# Altium PCB PCB1.PcbDoc
Units mil, origin at the board's own origin, x right, y up, seen from the top; angles counter-clockwise.
Board outline 1397.64 x 1968.5 mil, 2 copper layers (Top Layer, Bottom Layer), stack 47.288 mil thick; 25 components, 20 nets, 121 pads, 58 vias.
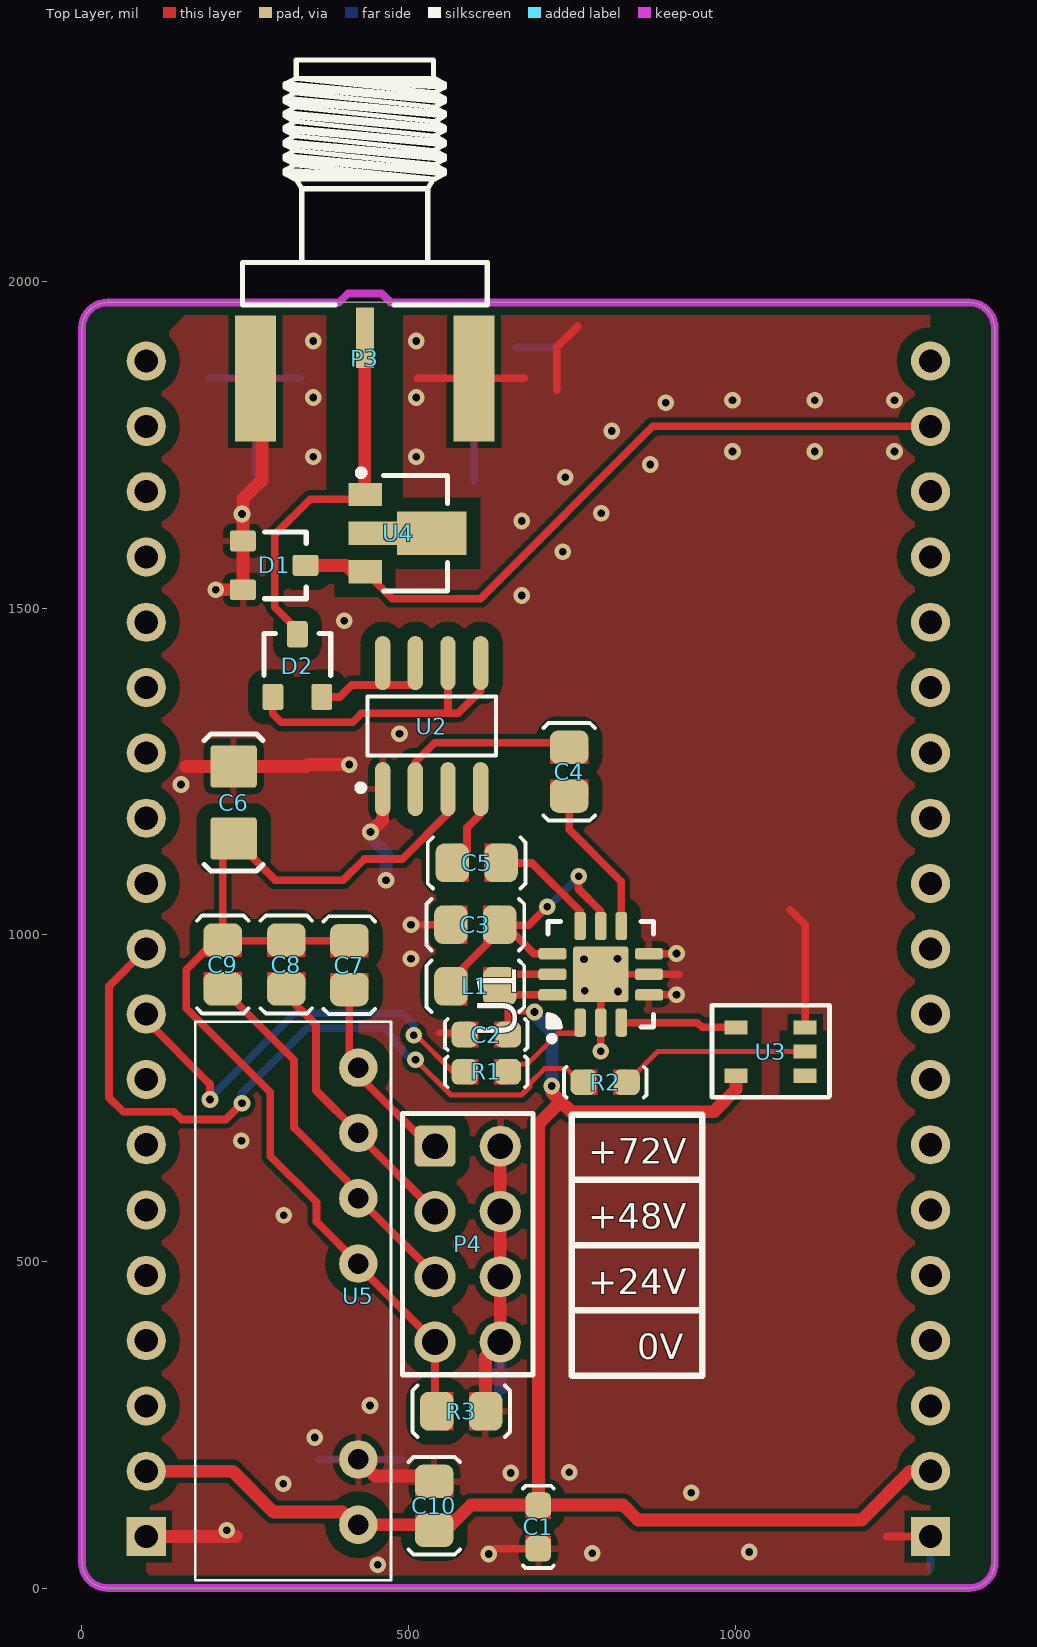
[diagram p0: Top Layer view]
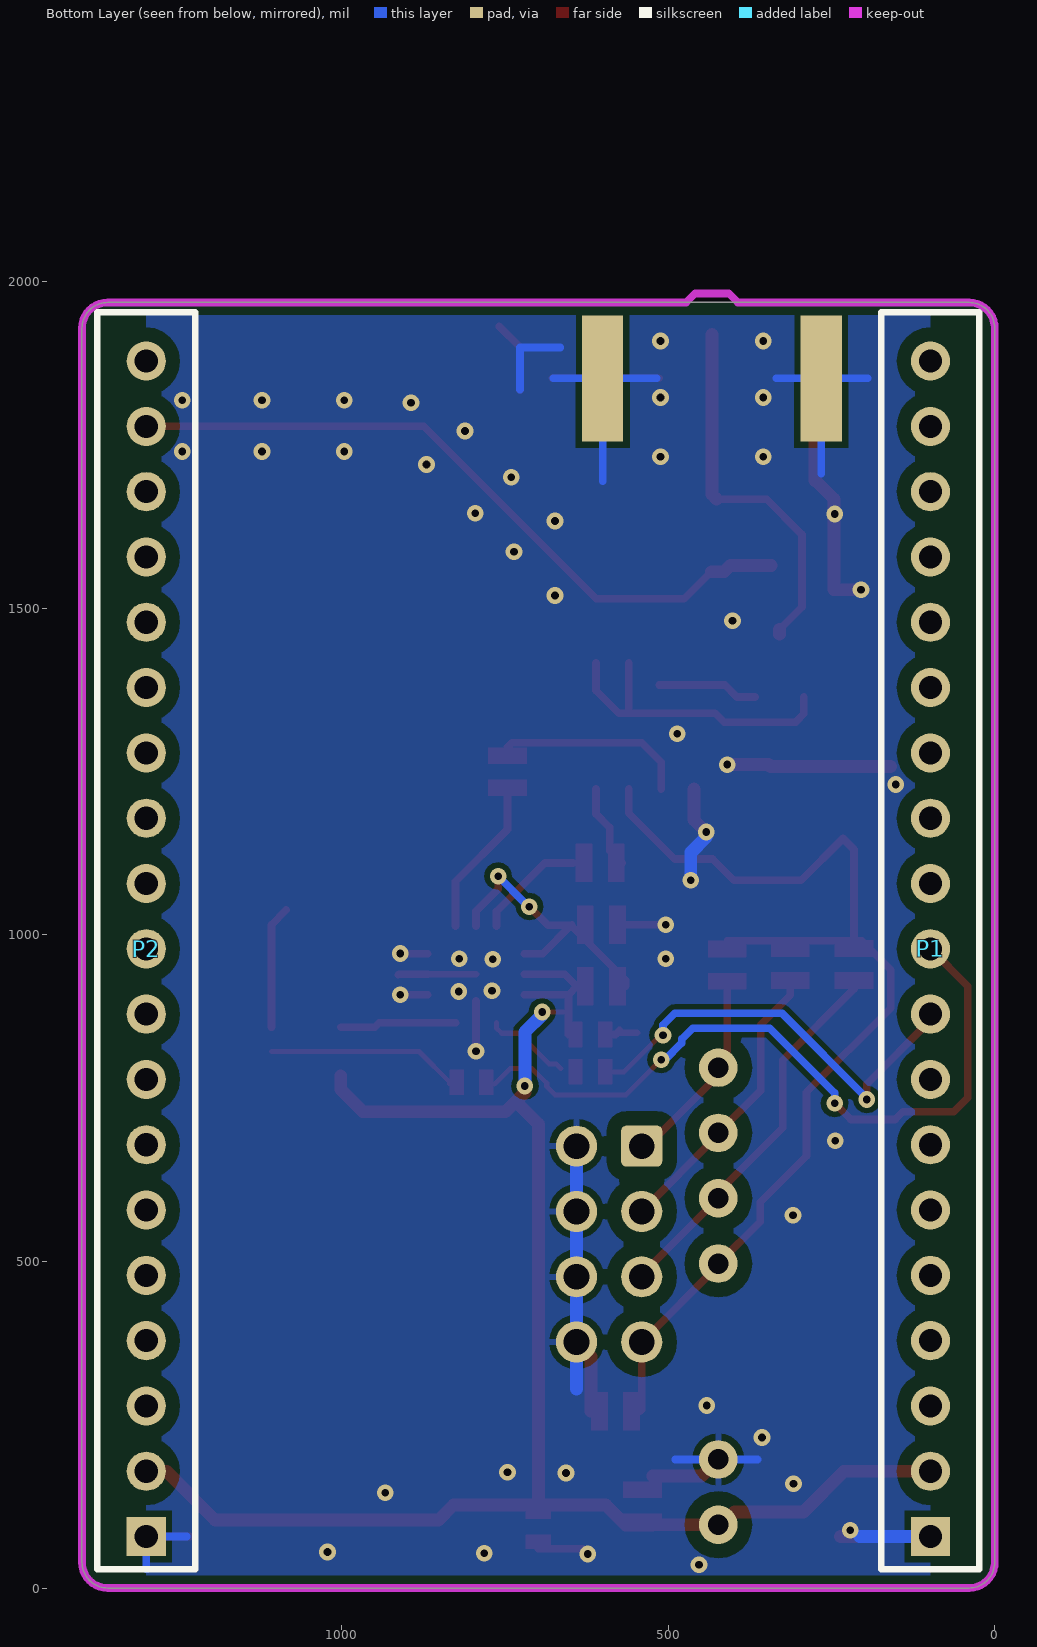
[diagram p1: Bottom Layer view, seen from below]
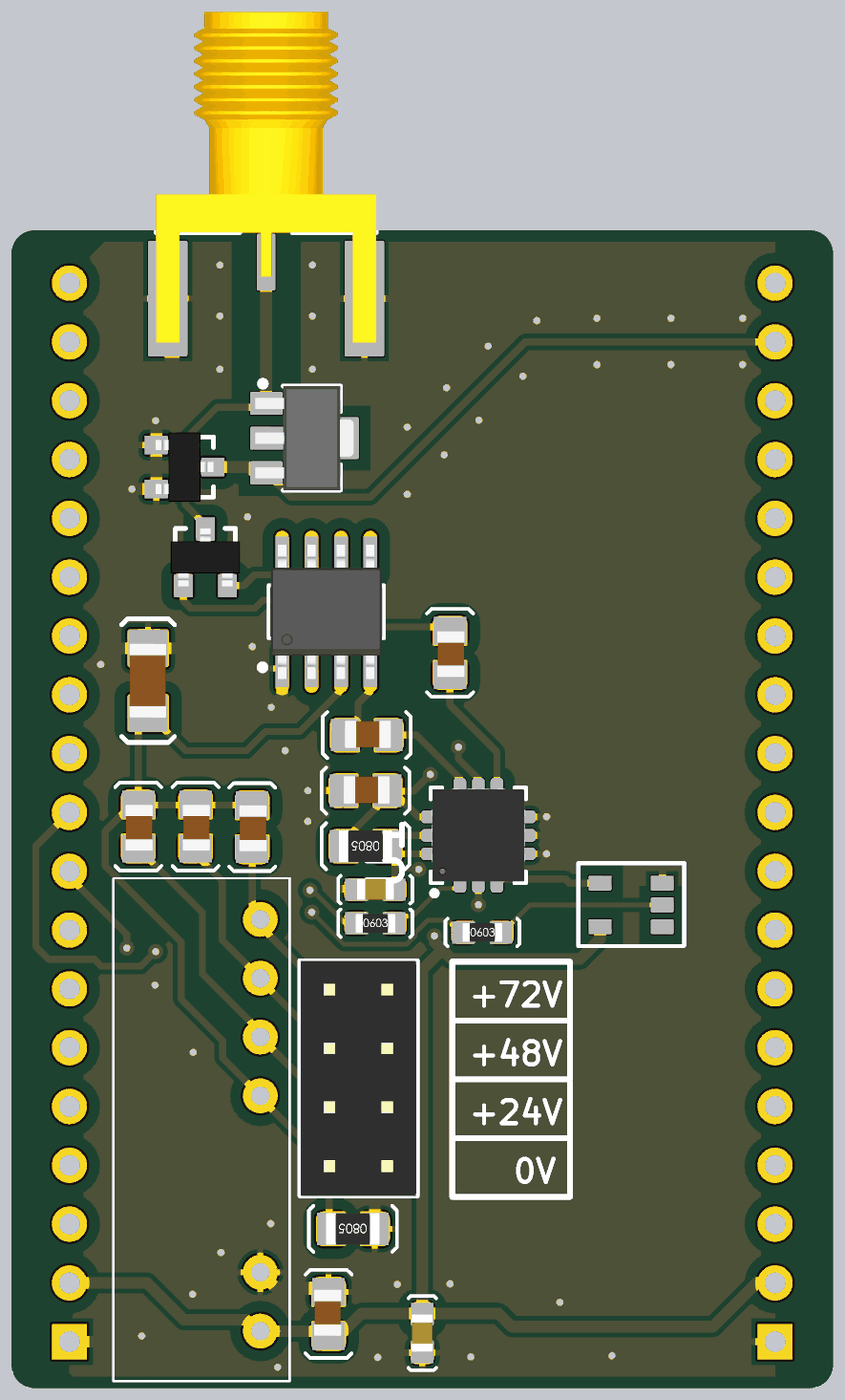
[diagram p2: 3D render of the assembled board from above, using the file's embedded part models]

## Layer stack, top to bottom
Top Solder: solder mask 0.4, Solder Resist, Dk 3.5
Top Layer: signal copper 1.4
Dielectric 1: dielectric 44.4882, FR-4, Dk 4.8
Bottom Layer: signal copper 1.4
Bottom Solder: solder mask 0.4, Solder Resist, Dk 3.5

## Board outline
0,39.37 ccw(c39.37,39.37) 39.37,0 1358.27,0 ccw(c1358.27,39.37) 1397.64,39.37 1397.64,1929.13 ccw(c1358.27,1929.13) 1358.27,1968.5 39.37,1968.5 ccw(c39.37,1929.13) 0,1929.13

## Design rules (kind name [scope] priority, off if disabled: settings)
Clearance Clearance_2 [Name Like '*-1111'] p1: gap=39.37
Clearance Clearance_1 [InPolygon vs IsPad] p2: gap=21.65
Clearance Clearance_3 [InPolygon] p3: gap=7.87
Clearance [All] p4: gap=9.84
HoleSize [All] p1 off: absolutevalues=TRUE maxlimit=100 minlimit=1 maxpercent=80.000 minpercent=20.000
MinimumSolderMaskSliver [All] p1: minsoldermaskwidth=2
PasteMaskExpansion [All] p1: expansion=1.97
PolygonConnect PolygonConnect_1 [All vs IsVia] p1: connectstyle=Direct reliefconductorwidth=10 reliefentries=4 polygonreliefangle="90 Angle" airgapwidth=10
PolygonConnect [All] p2: connectstyle=Relief reliefconductorwidth=10 reliefentries=4 polygonreliefangle="90 Angle" airgapwidth=10
RoomDefinition Sheet1 [InComponentClass('Sheet1')] p1 off: confinementstyle=ConfineIn formatcopy=TRUE lockcomponents=FALSE outline 3263.78,2138.78 2224.41,2138.78 2224.41,1812.01 3263.78,1812.01
RoutingVias [All] p1: holewidth=11.81 width=25.59 viastyle="Through Hole" minholewidth=11.81 minwidth=25.59 maxholewidth=11.81 maxwidth=25.59
SolderMaskExpansion [All] p1: expansion=4
Width [All] p1: maxlimit=120 minlimit=7.09 preferedwidth=7.09
26 further rules are at their usual default settings.

## Components (designator, comment, footprint, x,y, rotation, side; value= is the part's Value field where it differs from the comment)
C1 "0.1u" 0603RC 698.82,93.5 r90 top
C2 "0.1u" 0603RC 619.09,847.44 r0 top
C3 "1u" 0805RC 602.36,1015.75 r0 top
C4 "10nF 100V" 0805RC 746.06,1250 r270 top
C5 "10nF 100V" 0805RC 604.33,1110.24 r0 top
C6 "1uF 100V" 1206RC 232.28,1202.76 r270 top
C7 "10nF 100V" 0805RC 409.45,953.74 r270 top
C8 "10nF 100V" 0805RC 312.99,954.72 r270 top
C9 "10nF 100V" 0805RC 215.55,954.72 r270 top
C10 "1u" 0805RC 539.37,125.98 r90 top
D1 "BAV99" SOT-23 294.29,1565.94 r270 top
D2 "BAV99" SOT-23 329.72,1412.4 r0 top
L1 "BLM21PG121SN1D" 0805R 602.36,921.26 r180 top
P1 "PLS_2.54mm-19" PLS_2.54mm-19 98.43,78.74 r180 bottom
P2 "PLS_2.54mm-19" PLS_2.54mm-19 1299.21,78.74 r180 bottom
P3 "SMA" AMPHENOL_132357-11 433.07,1914.37 r270 top
P4 "PLD-8" PLD-8 590.55,526.57 r90 top
R1 "100" 0603R 619.09,790.35 r0 top
R2 "100" 0603R 801.18,774.61 r0 top
R3 "100k" 0805R 580.71,270.67 r180 top
U1 "MD1210K6" "QFN-12 4x4mm" 794.29,939.76 r90 top
U2 "TC6320TG" SOIC127P600-8N 535.43,1319.88 r90 top
U3 "74LVC1G17" SOT-23_5 1107.28,784.45 r90 top
U4 "MD0100N8-G" SOT89 510.83,1615.16 r0 top
U5 "NMT0572SC" NMT0572SC 423.23,96.85 r90 top

## Footprints (in the part's own frame and the unit in brackets; to place one, negate y for a bottom-side part, rotate by r counter-clockwise, add the part's x,y. Pads: shape width x height; smd on the part's side, far side on the other; paste and mask are expansions set on the pad)
0603R [mm] "Chip Resistor"
  rrect50% 1x1 smd paste-2 mask+0.076: 1(-0.85,0) 2(0.85,0)
  Top Layer region: 0.3,-0.5 0.85,-0.5 0.85,0.5 0.3,0.5
  Top Layer region: -0.85,-0.5 -0.3,-0.5 -0.3,0.5 -0.85,0.5
  silkscreen extent -1.6,-0.6 1.6,0.6, body extent -0.85,-0.4 0.85,0.4, height 0.56
0603RC [mm] "Chip Capacitor"
  rrect50% 1x1 smd paste-5 mask+0.076: 1(-0.85,0) 2(0.85,0)
  Top Layer region: 0.3,-0.5 0.85,-0.5 0.85,0.5 0.3,0.5
  Top Layer region: -0.85,-0.5 -0.3,-0.5 -0.3,0.5 -0.85,0.5
  silkscreen extent -1.6,-0.6 1.6,0.6, body extent -0.8,-0.44 0.8,0.46, height 0.79
0805R [mm] "Chip Resistor"
  rrect50% 1.3x1.5 smd paste-5 mask+0.102: 1(-0.95,0) 2(0.95,0)
  Top Layer region: -0.95,-0.75 -0.3,-0.75 -0.3,0.75 -0.95,0.75
  Top Layer region: 0.3,-0.75 0.95,-0.75 0.95,0.75 0.3,0.75
  silkscreen extent -1.9,-1 1.9,1, body extent -1.15,-0.67 1.15,0.68, height 0.76
0805RC [mm] "Chip Capacitor"
  rrect50% 1.3x1.5 smd paste-5 mask+0.102: 1(-0.95,0) 2(0.95,0)
  Top Layer region: -0.95,-0.75 -0.3,-0.75 -0.3,0.75 -0.95,0.75
  Top Layer region: 0.3,-0.75 0.95,-0.75 0.95,0.75 0.3,0.75
  silkscreen extent -1.9,-1 1.9,1, body extent -0.95,-0.56 1.05,0.64, height 1.2
1206RC [mm] "Chip Capacitor"
  rrect15% 1.65x1.8 smd paste-5: 1(-1.4,0) 2(1.4,0)
  silkscreen extent -2.67,-1.14 2.67,1.14, body extent -1.6,-0.81 1.6,0.79, height 1.6
AMPHENOL_132357-11 [mm]
  rect 2.35x0.7 smd: 1(0,0)
  rect 4.9x1.6 smd: 2(1.575,4.25) 2(1.575,-4.25)
  rect 4.9x1.6 smd far side: 2(1.575,4.25) 2(1.575,-4.25)
  silkscreen extent -10.81,-4.76 -1.28,4.76, body extent -10.8,-4.76 3.48,4.76, height 4.08
NMT0572SC [mm]
  round 1.5 hole 0.8: 1(0,0) 2(2.54,0) 5(10.16,0) 6(12.7,0) 7(15.24,0) 8(17.78,0)
  silkscreen extent -2.16,-1.27 19.56,6.35, body extent -2.16,-1.27 19.56,6.35, height 11.2
PLD-8 [mm] "Connector; Header; 4x2 Position"
  rrect25% 1.6x1.6 hole 1: 1(3.81,1.27)
  round 1.6 hole 1: 2(3.81,-1.27) 3(1.27,1.27) 4(1.27,-1.27) 5(-1.27,1.27) 6(-1.27,-1.27) 7(-3.81,1.27) 8(-3.81,-1.27)
  silkscreen extent -5.08,-2.54 5.08,2.54, body extent -5.08,-2.5 5.08,2.5, height 2.4
PLS_2.54mm-19 [mil] "soldering pads"
  rect 60x60 hole 35.43: 1(0,0)
  round 60 hole 35.43: 2(0,100) 3(0,200) 4(0,300) 5(0,400) 6(0,500) 7(0,600) 8(0,700) 9(0,800) 10(0,900) 11(0,1000) 12(0,1100) 13(0,1200) 14(0,1300) 15(0,1400) 16(0,1500) 17(0,1600) 18(0,1700) 19(0,1800)
  silkscreen extent -75,-50 75,1875
"QFN-12 4x4mm" [mm] "0.8 mm pitch"
  rrect50% 1.1x0.45 smd: 1(-1.88,0.8) 2(-1.88,0) 3(-1.88,-0.8) 7(1.88,-0.8) 8(1.88,0) 9(1.88,0.8)
  rrect50% 0.45x1.1 smd: 4(-0.8,-1.88) 5(0,-1.88) 6(0.8,-1.88) 10(0.8,1.88) 11(0,1.88) 12(-0.8,1.88)
  rrect10% 2.15x2.15 smd: 13(0,0)
  silkscreen extent -2.6,-2.05 2.05,2.05, body extent -2,-2 2,2, height 0.92
SOIC127P600-8N [mm] "SOIC, 8-Leads, Body 4.9x3.9mm, Pitch 1.27mm, IPC Medium Density"
  oval 2.1x0.6 smd paste-5: 1(-2.45,1.905) 2(-2.45,0.635) 3(-2.45,-0.635) 4(-2.45,-1.905) 5(2.45,-1.905) 6(2.45,-0.635) 7(2.45,0.635) 8(2.45,1.905)
  silkscreen extent -2.52,-2.5 1.14,2.88, body extent -2.9,-2.4 2.9,2.4, height 1.75
SOT89 [mm]
  rect 1.3x0.9 smd: 1(-1.965,1.5) 3(-1.965,-1.5)
  rect 1.9x0.9 smd: 2(-1.665,0)
  rect 2.7x1.7 smd: 2(0.635,0)
  silkscreen extent -2.24,-2.25 1.24,2.47, body extent -2.44,-2.25 1.81,2.25, height 1.6
SOT-23 [mil] "SOT-23; 3 Leads; Body 3.0 x 2.6 mm, inc. leads (LxW max)"
  rrect25% 32x40 smd paste-196.85: 1(-37.4,-48) 2(37.4,-48) 3(0,48)
  silkscreen extent -51,-15 51,49, body extent -59,-49 59,49, height 44
SOT-23_5 [mm]
  rect 0.55x0.9 smd: 1(0,0) 2(0.94,0) 3(1.88,0) 4(1.88,2.689) 5(0,2.689)
  silkscreen extent -0.84,-0.95 2.74,3.62

## Part data
C1 C2 C3 C4 C5 C6 C7 C8 C9 C10: library part Cap, "Capacitor"
D1 D2: library part BAV199, "Medium-speed Switching Double Diode with Low Leakage Current"
L1: library part Inductor, "Inductor"
P3: library part AMPHENOL_132357-11
P4: library part "Header 4X2", "Header, 4-Pin, Dual row"
R1 R2 R3: library part Res1, "Resistor"
U1: library part MD1210
U2: library part TC6320, "N- and P-Channel  Enhancement-Mode MOSFET Pair"
U3: "shmitt trigger sot23-5"
U4: "3-Ultra-Sound HV Switch 1=A 2=COM 3=B"
U5: library part "Header 8", "Horizontal"

## Via types
v1: diameter 25.59, hole 11.81, Top Layer to Bottom Layer, tented both sides, 58 vias

## Nets (pads, with @x,y where several pads share a name; then routed paths per layer and width w, separated by ;. In a path a pad name is that pad's centre, name@x,y a point inside that pad or via, vN(x,y) a via of type N, cw(c..) or ccw(c..) an arc to the next point about the centre after c; other vN are vias at no path point)
5V: C1.2 C2.2 C10.1 L1.1 P1.2 P2.2 U1.11 U1.12 U3.5 U5.1 | length 2646
  Top Layer w8: 652.56,883.86 654.53,881.89 v1(692.91,881.89)
  Top Layer w11.81: C2.2 652.56,883.86 L1.1@652.56,908.46 ; U1.12 652.76,908.27 L1.1@652.56,908.46 ; U1.11 658.27,939.76 L1.1 L1.1@652.56,908.46
  Top Layer w19.68: P1.2 230.71,178.74 293.31,116.14 398.62,116.14 417.91,96.85 U5.1 523.23,96.85 523.62,96.46 564.96,96.46 595.47,126.97 C1.2 ; v1@719.49,758.86 733.27,745.08 ; U3.5 1001.41,763.22 967.52,729.33 749.02,729.33 733.27,745.08 ; P2.2 1268.31,178.74 1193.9,104.33 851.38,104.33 828.74,126.97 C1.2 ; C1.2 698.82,710.63 733.27,745.08
  Bottom Layer w19.68: v1@692.91,877.95 719.49,851.38 v1(719.49,768.7)
GND: C1.1 C2.1 C3.1 C6.1 C10.2 D1.1 D1.2 P1.1 P2.1 P3.2 P4.2 P4.4 P4.6 P4.8 R3.1 U1.2 U1.4 U1.5 U1.6 U1.13 U2.1 U3.3 U5.2 | length 3923.1
  Top Layer w10: 547.24,850.39 C2.1@577.76,850.39 ; U1.13 U1.5
  Top Layer w11.81: v1(503.94,1015.75) C3.1@572.83,1015.75 ; 513.78,1852.36 600.39,1852.36 677.17,1852.36 ; C2.1@574.56,853.59 580.71,847.44 C2.1 ; v1(623.03,52.17) 630.91,60.04 C1.1 ; 726.77,1834.06 726.77,1899.61 758.86,1931.69 ; v1(794.29,821.85) U1.2 U1.13@794.29,899.4 ; U1.4 v1(910.24,908.27) ; U1.5 912.6,939.76 913.39,938.98 ; U1.6 910.24,971.26 v1(910.43,971.46) ; 1084.65,1038.39 1107.28,1015.75 U3.3 ; 1232.28,78.74 P2.1
  Top Layer w19.68: P1.1 236.22,78.74 ; 159.45,1257.87 C6.1 343.5,1257.87 346.46,1260.83 v1(409.45,1260.83) ; v1(204.72,1528.54) D1.2 D1.1 246.29,1667.38 274.61,1695.69 ; P3.2@265.75,1857.28 247.28,1838.81 247.28,1809.81 275.59,1781.5 275.59,1695.69 ; U5.2 448.82,171.26 C10.2@523.62,171.26 ; v1(441.93,1157.48) 460.43,1175.98 U2.1 ; R3.1 618.11,354.13 P4.8 P4.6 P4.4 P4.2
  Bottom Layer w11.81: 194.88,1852.36 P3.2@265.75,1852.36 ; 265.75,1706.69 P3.2@265.75,1852.36 ; 334.65,1852.36 P3.2@265.75,1852.36 ; 363.19,196.85 U5.2 489.17,196.85 ; 517.72,1852.36 P3.2@600.39,1852.36 ; 600.39,1694.88 P3.2@600.39,1852.36 ; 665.35,1899.61 726.77,1899.61 726.77,1835.04 ; 676.18,1852.36 P3.2@600.39,1852.36 ; 1237.2,78.74 P2.1 1299.21,28.54
  Bottom Layer w19.68: P1.1 206.69,78.74 ; v1(441.93,1157.48) 441.93,1149.61 465.55,1125.98 v1(465.55,1083.66) ; 640.55,304.92 P4.8 P4.6 P4.4 P4.2
  other v1: 452.76,35.43 781.5,53.15 1021.65,55.12 221.46,88.58 933.07,145.67 308.07,159.45 656.5,176.18 746.06,177.17 356.3,230.32 440.94,279.53 309.06,570.87 244.09,685.04 820.87,913.39 769.68,914.37 503.94,963.58 768.7,962.6 819.88,963.58 151.57,1230.32 486.22,1308.07 401.57,1481.3 673.23,1519.69 736.22,1586.61 673.23,1633.86 245.08,1644.69 795.28,1645.67 740.16,1700.79 870.08,1720.47 354.33,1732.28 511.81,1732.28 996.06,1740.16 1122.05,1740.16 1244.09,1740.16 811.02,1771.65 893.7,1814.96 996.06,1818.9 1122.05,1818.9 1244.09,1818.9 354.33,1822.83 511.81,1822.83 354.33,1909.45 511.81,1909.45
NetC3_2: C3.2 L1.2 U1.8 U1.10 | length 451.6
  Top Layer w11.81: L1.2 564.96,930.49 C3.2@647.64,1013.16 ; v1(712.6,1043.31) 684.06,1014.76 649.24,1014.76 C3.2@648.93,1014.46 ; U1.10 692.13,971.26 C3.2@648.93,1014.46 ; v1@763.78,1086.61 760.28,1083.11 760.28,1070.43 794.29,1036.42 U1.8 ; C3.2@647.64,1013.16 C3.2@648.93,1014.46 ; C3.2@647.64,1013.16 647.64,1015.75 C3.2@648.93,1014.46
  Bottom Layer w11.81: v1@718.5,1041.34 718.5,1047.98 v1(760.46,1089.94)
NetC4_1: C4.1 U2.2 | length 291.8
  Top Layer w11.81: U2.2 510.43,1264.37 540.35,1294.29 739.17,1294.29 C4.1
NetC4_2: C4.2 U1.7 | length 231.8
  Top Layer w11.81: C4.2 746.06,1161.42 825.79,1081.69 U1.7
NetC5_1: C5.1 U2.4 | length 129.6
  Top Layer w11.81: C5.1@570.87,1110.24 589.57,1128.94 589.57,1164.37 610.43,1185.24 U2.4
NetC5_2: C5.2 U1.9 | length 170.3
  Top Layer w11.81: C5.2@645.67,1110.24 688.98,1110.24 762.8,1036.42 U1.9
NetC7_2: C7.2 P4.1 U5.8 | length 299
  Top Layer w11.81: C7.2 409.45,810.63 U5.8 423.23,785.43 532.09,676.57 P4.1
NetC8_2: C8.2 P4.3 U5.7 | length 435
  Top Layer w11.81: C8.2 312.99,907.48 358.27,862.2 358.27,761.81 U5.7 423.23,693.9 P4.3
NetC9_2: C9.2 P4.5 U5.6 | length 575.4
  Top Layer w11.81: C9.2 324.8,808.07 324.8,704.72 423.23,606.3 U5.6 540.55,479.53 P4.5
NetD1_3: D1.3 P2.18 U4.3 | length 1087.5
  Top Layer w11.81: U4.3@434.05,1556.1 475.39,1514.76 610.24,1514.76 874.21,1778.74 P2.18
  Top Layer w19.68: D1.3 404.53,1565.94 414.37,1556.1 U4.3 U4.3@434.05,1556.1
NetD2_1: D2.1 U2.5 U2.6 | length 488.2
  Top Layer w11.81: D2.1 292.32,1338.58 305.12,1325.79 414.37,1325.79 428.15,1339.57 560.43,1339.57 ; U2.6 560.43,1339.57 ; U2.5 610.43,1374.21 575.79,1339.57 560.43,1339.57
NetD2_2: D2.2 U2.7 U2.8 | length 154.3
  Top Layer w11.81: D2.2 394.91,1364.4 413.39,1382.87 476.97,1382.87 U2.7@513.78,1382.87
NetD2_3: D2.3 P3.1 U4.1 | length 575
  Top Layer w11.81: D2.3@329.72,1467.52 295.28,1501.97 295.28,1613.19 349.41,1667.32 U4.1@425.79,1667.32
  Top Layer w19.68: D2.3 D2.3@329.72,1467.52 ; U4.1@425.79,1667.32 433.07,1674.61 433.07,1719.49 P3.1 P3.1@433.07,1919.29
NetR1_2: R1.2 U1.1 | length 132.6
  Top Layer w7.87: R1.2@664.37,795.28 671.75,802.66 682.58,802.66 729.33,849.41 754.92,849.41 762.8,857.28 U1.1
NetR2_2: R2.2 U3.2 | length 304.6
  Top Layer w7.87: R2.2@825.79,780.51 R2.2@834.65,771.65 ; R2.2 881.49,821.45 U3.2
NetU1_3: U1.3 U3.4 | length 178.6
  Top Layer w11.81: U1.3 942.32,865.75 949.62,858.45 U3.4
PULSE_A: P1.9 R1.1 | length 663.2
  Top Layer w7.87: P1.9@98.43,869.09 P1.9 ; v1@508.86,849.41 567.91,790.35 R1.1
  Top Layer w11.81: P1.9@98.43,869.09 195.87,771.65 v1(195.87,748.03)
  Bottom Layer w7.87: v1(195.87,748.03) v1@195.87,750
  Bottom Layer w11.81: v1@195.87,750 325.79,879.92 490.16,879.92 507.87,862.2 v1(507.87,846.46)
PULSE_B: P1.10 R2.1 | length 1134
  Top Layer w7.87: v1(510.83,809.06) 564.96,754.92 632.12,754.92 673,754.92 686.02,767.94 686.02,772.82 708.48,795.28 742.13,795.28 765.75,771.65 R2.1@767.72,771.65
  Top Layer w11.81: P1.10 41.34,921.65 41.34,750.98 62.99,729.33 140.75,729.33 152.56,717.52 220.47,717.52 v1(245.08,742.13)
  Bottom Layer w11.81: v1(245.08,742.13) 245.08,757.87 344.49,857.28 462.6,857.28 479.33,840.55 479.33,834.63 504.91,809.06 v1(510.83,809.06)
V_POS: C6.2 C7.1 C8.1 C9.1 P4.7 R3.2 U2.3 U5.5 | length 1700.2
  Top Layer w11.81: C9.1 215.55,1130.91 C6.2 296.26,1083.66 399.61,1083.66 432.09,1116.14 490.16,1116.14 560.43,1186.42 U2.3 ; C7.1 203.74,991.14 159.45,946.85 159.45,887.8 288.39,758.86 288.39,661.42 359.25,590.55 359.25,560.83 U5.5 423.23,493.9 P4.7 540.55,273.43 R3.2
pads on no net: P1.3 P1.4 P1.5 P1.6 P1.7 P1.8 P1.11 P1.12 P1.13 P1.14 P1.15 P1.16 P1.17 P1.18 P1.19 P2.3 P2.4 P2.5 P2.6 P2.7 P2.8 P2.9 P2.10 P2.11 P2.12 P2.13 P2.14 P2.15 P2.16 P2.17 P2.19 U3.1 U4.2

## Polygon pours and split planes (outlines as drawn)
GND on Bottom Layer "GND_BOT" (solid, pour order 2): 98.43,19.68 98.43,1948.82 1299.21,1948.82 1299.21,19.68
GND on Top Layer "GND_TOP" (solid, remove dead copper, pour order 0): 157.48,1948.82 1299.21,1948.82 1299.21,19.68 98.43,19.68 98.43,1889.76

## Keep-outs
Keep-Out Layer:
  lines w11.81: 0,39.37 ccw(c39.37,39.37) 39.37,0 1358.27,0 ccw(c1358.27,39.37) 1397.64,39.37 1397.64,1929.13 ccw(c1358.27,1929.13) 1358.27,1968.5 472.44,1968.5 458.66,1982.28 407.48,1982.28 393.7,1968.5 39.37,1968.5 ccw(c39.37,1929.13) 0,1929.13 0,39.37

## Other copper
Top Layer:
  pour cut-out: 374.02,2007.87 374.02,1653.54 492.13,1653.54 492.13,2007.87

## Silkscreen, mask and mechanical layers (free items; w line width, h text height)
Top Overlay:
  lines w10: 750,525 950,525 ; 750,625 950,625 ; 750,425 950,425 ; 750,425 750,725 950,725 950,425 ; 750,425 750,325 950,325 950,425
  text "+72V" at 775,650 h39.37
  text "+48V" at 775,550 h39.37
  text "+24V" at 775,450 h39.37
  text "+24V" at 775,450 h39.37
  text "0V" at 850,350 h39.37
Shape:
  the board outline again, w5.91
Values-Top:
  text "120" at 568.9,905.51 h43.31